# EAGLE board rs-485-power-injector (EAGLE 7.5.0)
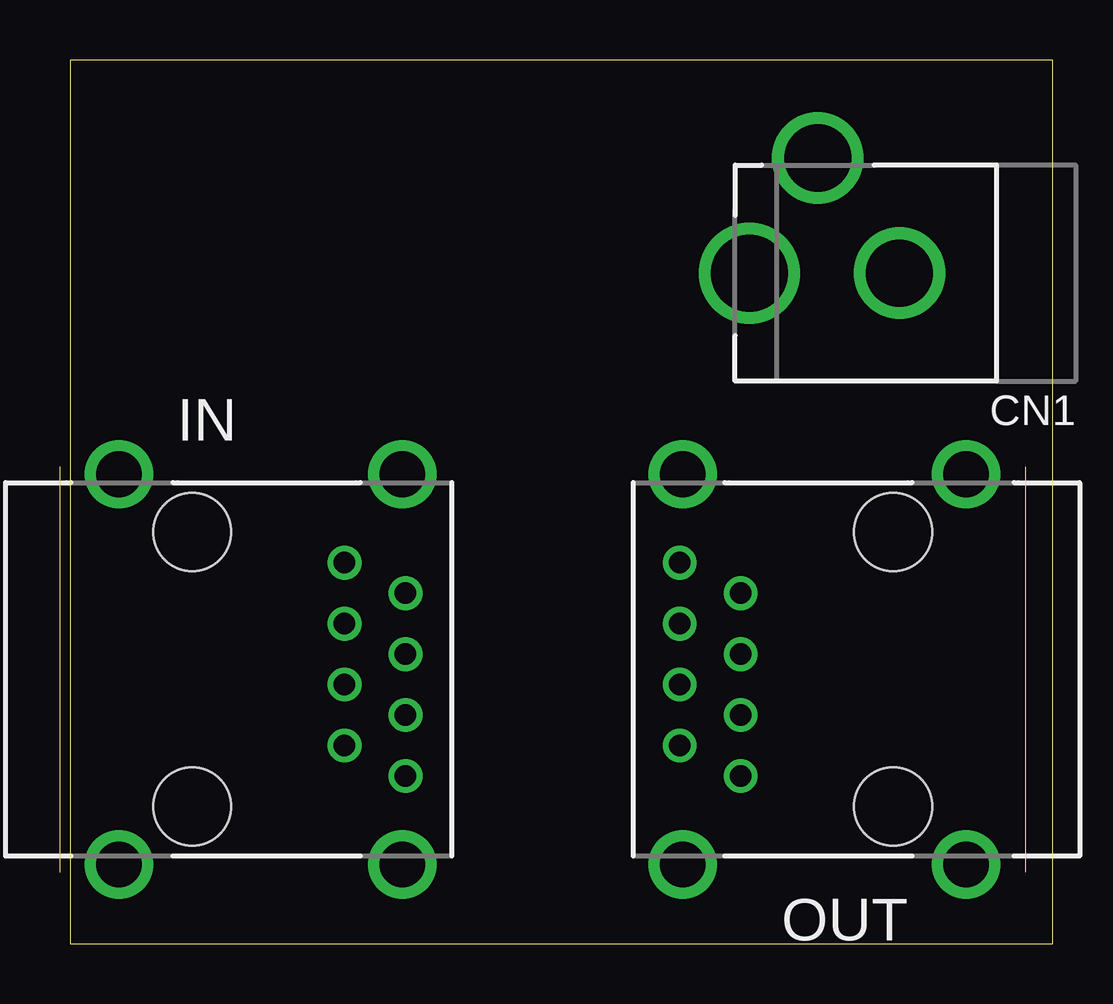
[diagram p0: board, top side]
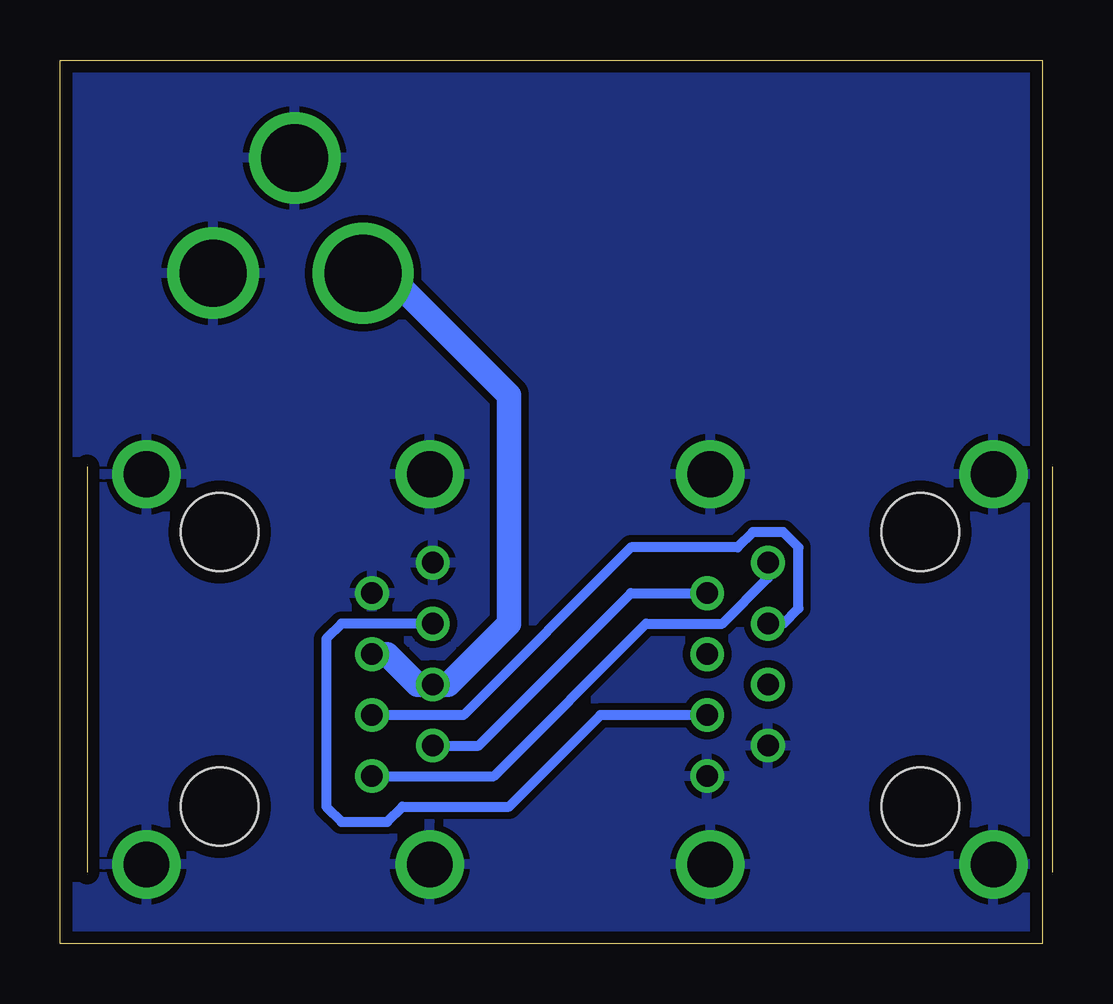
[diagram p1: board, bottom side, seen from below]

Size 40.95 x 36.82 mm. Coordinates in mm from the lower left corner, seen from the top.
Outline: 0,0 40.95,0 40.95,36.82 0,36.82 0,0
Copper layers (1*16): Top 0.035mm / dielectric 1.5mm / Bottom 0.035mm
Design rules "default *": minimum track width 10mil, minimum drill 24mil, track to track 12mil, track to pad 12mil, pad to pad 12mil, via to via 12mil, smd to smd 12mil, copper to edge 20mil, drill to drill 8mil, minimum pad ring 10mil, minimum via ring 8mil, stop-mask expansion 4mil, vias tented up to drill 0mil, thermal gap 10mil

## Footprints (pad centres in the part's own frame; a part is rotated, then mirrored left to right if it is on the bottom)
DCJACK_2MM_PTH = drill 2.8: GND 0,7.35; GNDBREAK 4.8,10.75 | drill 3.2: PWR 0,13.6
RJ45-SHIELD1 = drill 0.9 pad 1.4: 1 -4.445,6.35; 2 -3.175,8.89; 3 -1.905,6.35; 4 -0.635,8.89; 5 0.635,6.35; 6 1.905,8.89; 7 3.175,6.35; 8 4.445,8.89 | drill 1.9 pad 2.5: S1 -8.128,-3.048; S2 8.128,-3.048; S3 -8.128,8.76; S4 8.128,8.76 | hole 3.251: -5.715,0; 5.715,0

## Placement (x,y rotation side)
CN1  [DCJACK_2MM_PTH]  41.91,27.94 90 top
IN  RJ45-6L21-B  [RJ45-SHIELD1]  5.08,11.43 270 top
OUT  RJ45-6L21-B  [RJ45-SHIELD1]  34.29,11.43 90 top

## Library data of the parts
CN1 = adafruit
IN OUT = con-tycoelectronics; OC_FARNELL: unknown; OC_NEWARK: unknown

## Nets
GND: CN1.GND CN1.GNDBREAK IN.7 IN.8 IN.S1 IN.S2 IN.S3 IN.S4 OUT.7 OUT.8 OUT.S1 OUT.S2 OUT.S3 OUT.S4
N$1: IN.1 OUT.1
N$2: IN.2 OUT.2
N$3: IN.3 OUT.3
N$4: IN.6 OUT.6
N$6: CN1.PWR OUT.4 OUT.5

## Tracks (layer width: path | path; a pad name or v marks a point on that pad's centre or on a via)
GND
  pour Bottom: 0,36.83 40.64,36.83 40.64,0 0,0
N$1
  Bottom 0.406: OUT.1 22.86,6.99 16.51,13.34 13.34,13.34 11.43,15.24 IN.1
N$2
  Bottom 0.406: OUT.2 23.5,8.26 17.14,14.61 IN.2
N$3
  Bottom 0.406: IN.3 10.79,13.34 10.16,13.97 10.16,16.51 10.79,17.14 12.06,17.14 12.7,16.51 17.14,16.51 24.13,9.53 OUT.3
N$4
  Bottom 0.406: IN.6 18.41,9.53 22.23,5.71 26.67,5.71 27.3,5.08 29.21,5.08 29.84,5.71 29.84,12.7 29.21,13.34 OUT.6
N$6
  Bottom 1.016: CN1.PWR 27.3,27.94 22.23,22.86 22.23,13.34 24.77,10.79 OUT.4 26.04,10.79 27.3,12.06 OUT.5